# Altium PCB UCC28180-Controller.PcbDoc
Units mil, origin at the board's own origin, x right, y up, seen from the top; angles counter-clockwise.
Board outline 1574.8 x 1100 mil, 4 copper layers (Top Layer, Signal Layer 1, Signal Layer 2, Bottom Layer), stack 30.634 mil thick; 22 components, 10 nets, 52 pads, 21 vias.
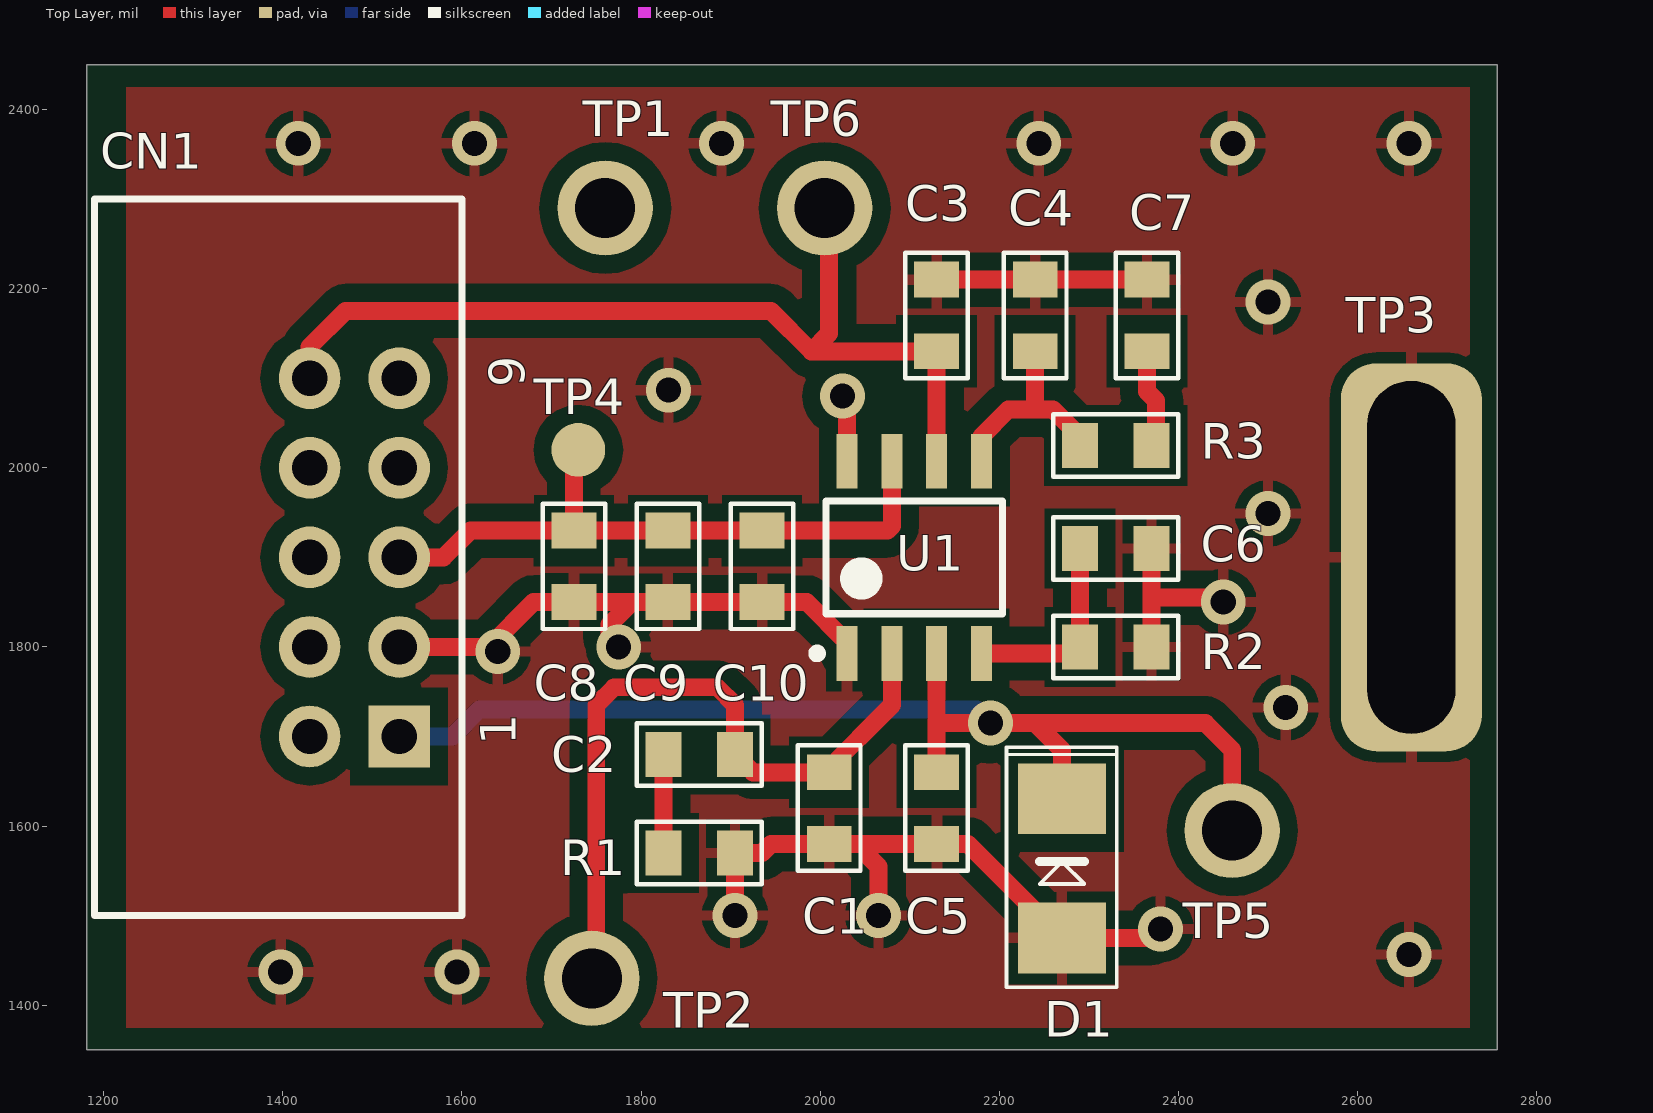
[diagram p0: Top Layer view]
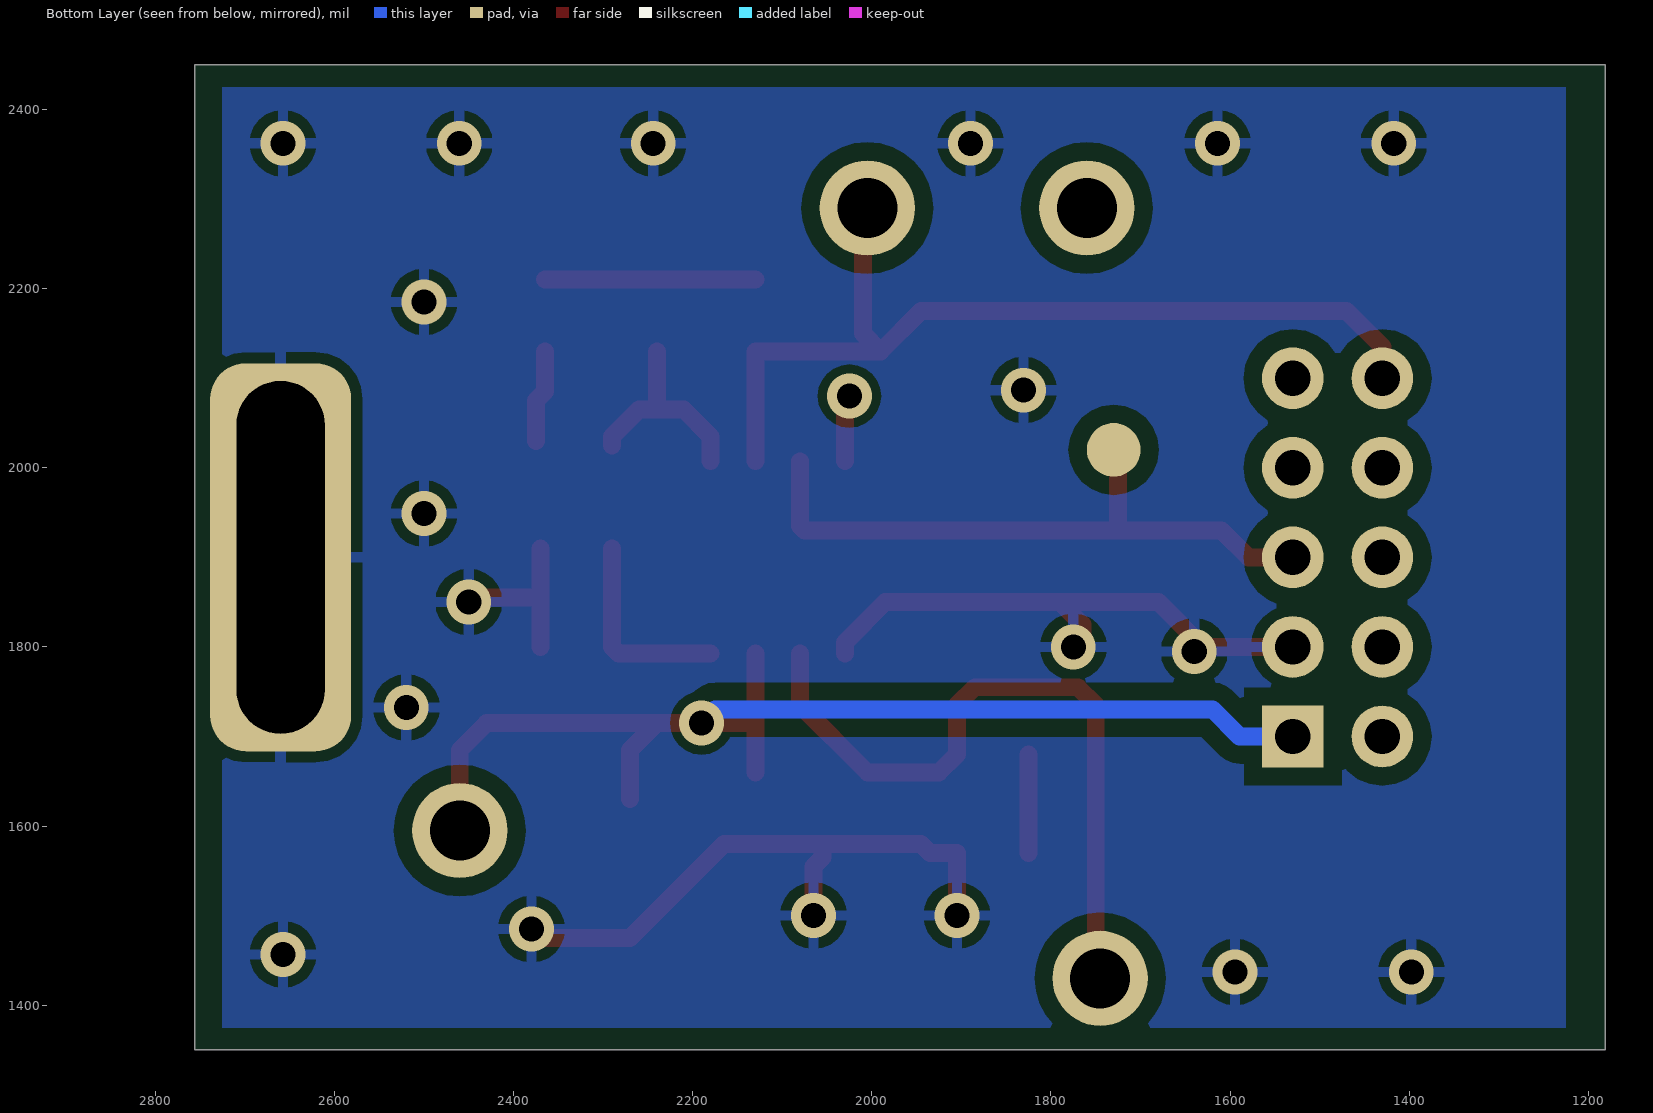
[diagram p1: Bottom Layer view, seen from below]
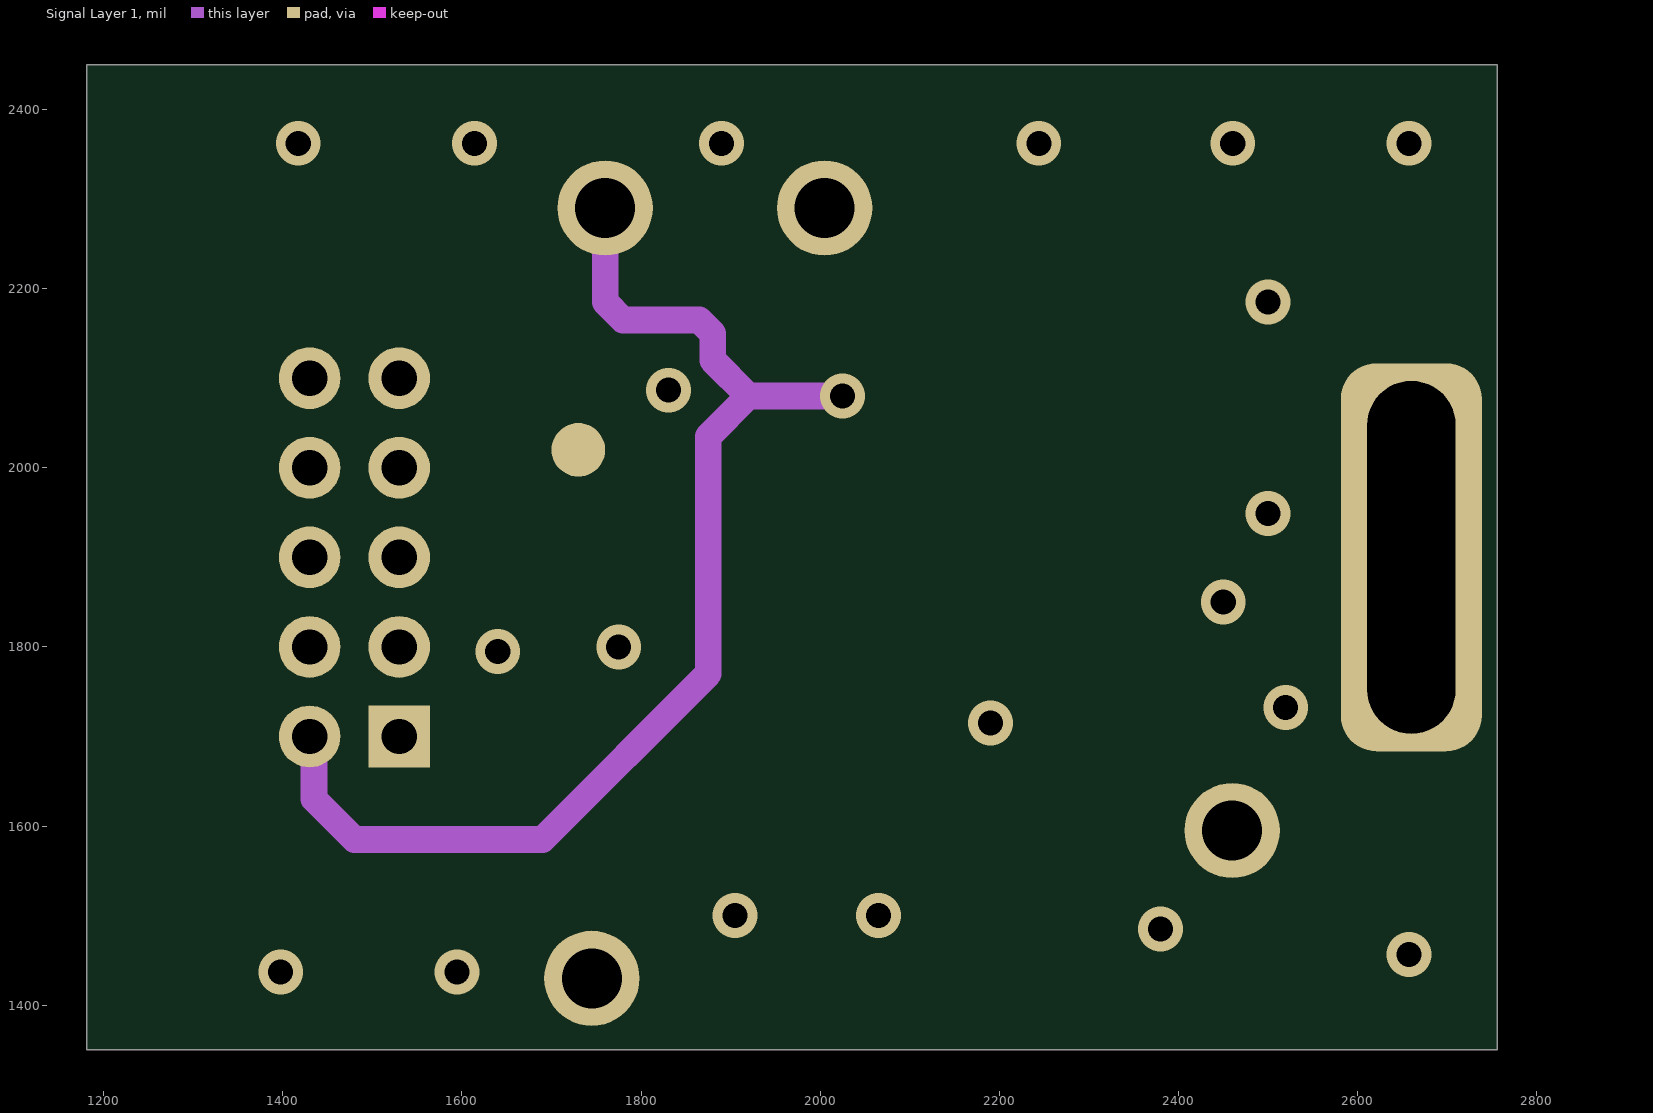
[diagram p2: Signal Layer 1]
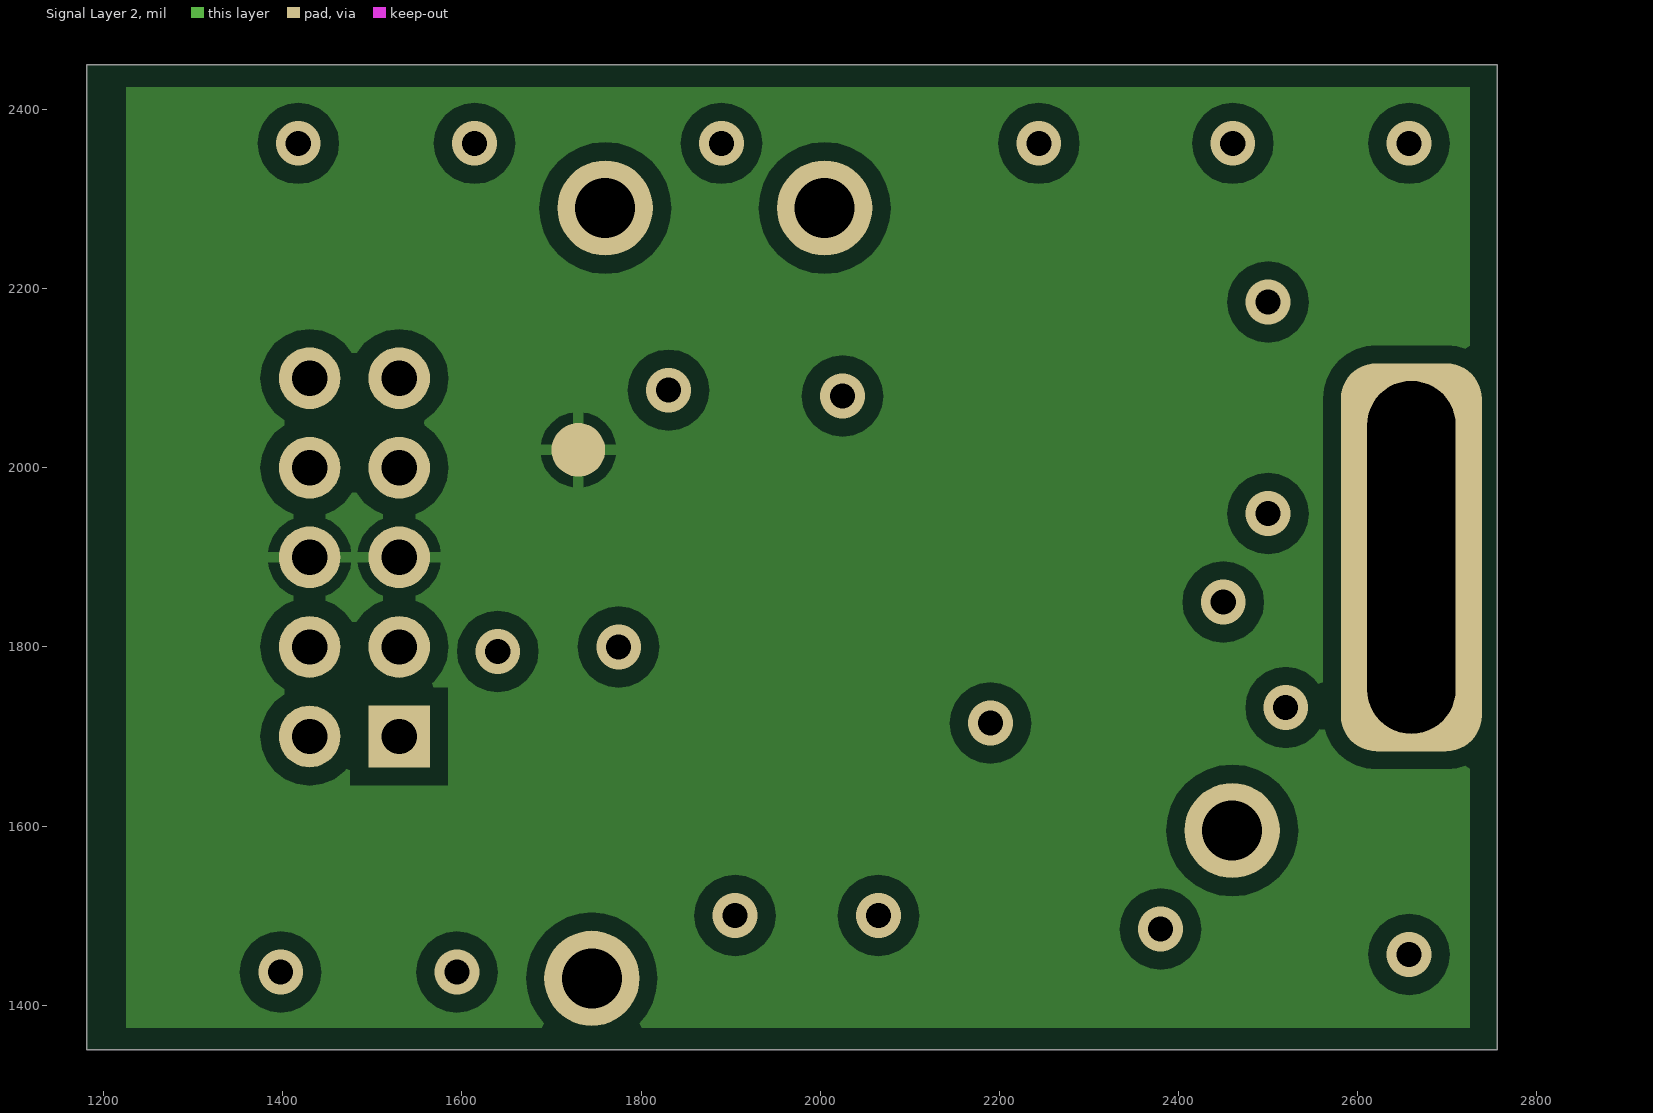
[diagram p3: Signal Layer 2]

## Layer stack, top to bottom
Top Solder: solder mask 0.4, Solder Resist, Dk 3.5
Top Layer: signal copper 1.4
Dielectric 1: core 10, FR-4, Dk 4.2
Signal Layer 1: signal copper 1.417
Dielectric 2: prepreg 5, Dk 4.2
Signal Layer 2: signal copper 1.417
Dielectric 3: core 10, Dk 4.2
Bottom Layer: signal copper 1.4
Bottom Solder: solder mask 0.4, Solder Resist, Dk 3.5

## Board outline
1181.1,1350 2755.91,1350 2755.91,2450 1181.1,2450

## Design rules (kind name [scope] priority, off if disabled: settings)
Clearance Clearance_3 [InNamedPolygon('Top Layer-GND')] p1: gap=10 except(20: Arc-Poly Track-Poly SMDPad-Poly THPad-Poly Via-Poly Fill-Poly Poly-Poly)
Clearance Clearance_2 [InNamedPolygon('Top Layer-GND')] p2: gap=10 except(20: Arc-Poly Track-Poly SMDPad-Poly THPad-Poly Via-Poly Fill-Poly Poly-Poly)
Clearance Clearance_1 [InNamedPolygon('Signal layer 2-12V')] p3: gap=10 except(20: Arc-Poly Track-Poly SMDPad-Poly THPad-Poly Via-Poly Fill-Poly Poly-Poly)
Clearance [All] p4: gap=10 except(20: Arc-Poly Track-Poly SMDPad-Poly THPad-Poly)
PlaneConnect [All] p1: planeconnectstyle=Relief reliefexpansion=20 reliefentries=4 reliefconductorwidth=12 reliefairgap=12
PolygonConnect [All] p1: connectstyle=Relief reliefconductorwidth=12 reliefentries=4 polygonreliefangle="90 Angle" airgapwidth=12
RoutingVias [All] p1: holewidth=28 width=50 viastyle="Through Hole" minholewidth=28 minwidth=50 maxholewidth=28 maxwidth=50
SolderMaskExpansion [All] p1: expansion=4
UnConnectedPin [All] p1:
Width [All] p1: maxlimit=200 minlimit=10 preferedwidth=10 midlayer2_maxwidth=10 minimp=50.000000 maximp=50.000000 favimp=50.000000
29 further rules are at their usual default settings.

## Components (designator, comment, footprint, x,y, rotation, side; value= is the part's Value field where it differs from the comment)
C1 "GRM2195C1H562FA01D" CAP0805_NEW 2010,1620 r90 top
C2 "C0805_Generic" CAP0805_NEW 1865,1680 r0 top
C3 "CC0805KRX7R9BB821" CAP0805_NEW 2130,2170 r270 top
C4 "C0805C474J5RACTU" CAP0805_NEW 2240,2170 r270 top
C5 "C0805C102J5GACTU" CAP0805_NEW 2130,1620 r90 top
C6 "C0805_Generic" CAP0805_NEW 2330,1910 r180 top
C7 "GRM21BR61H475KE51L" CAP0805_NEW 2365,2170 r270 top
C8 "C0805C104J5RACAUTO" CAP0805_NEW 1725,1890 r90 top
C9 "CC0805JKX7R9BB105" CAP0805_NEW 1830,1890 r90 top
C10 "C0805_Generic" CAP0805_NEW 1935,1890 r90 top
CN1 "MHR10N-ND" 3M15452 1530,1700 r90 top
D1 "MRA4004T3G" MRA4004T3G 2270,1555 r270 top
R1 "R0805_Generic" RES0805_New 1865,1570 r0 top
R2 "RC0805FR-0722KL" RES0805_New 2330,1800 r0 top
R3 "RC0805FR-0722K6L" RES0805_New 2330,2025 r0 top
TP1 "5006" "Test Point" 1760,2290 r0 top
TP2 "5006" "Test Point" 1745,1430 r0 top
TP3 "TP-Slot" TP-Slot 2660,1900 r90 top
TP4 "TP-SM" TP-SM 1730,2020 r90 top
TP5 "5006" "Test Point" 2460,1595 r0 top
TP6 "5006" "Test Point" 2005,2290 r0 top
U1 "UCC28180DR" SOP127P600X175-8N 2105,1900 r90 top

## Footprints (in the part's own frame and the unit in brackets; to place one, negate y for a bottom-side part, rotate by r counter-clockwise, add the part's x,y. Pads: shape width x height; smd on the part's side, far side on the other; paste and mask are expansions set on the pad)
3M15452 [mm] "CONN HEADER 10POS DL R/A GOLD"
  rect 1.75x1.75 hole 1: 1(0,0)
  round 1.75 hole 1: 2(0,2.54) 3(2.54,0) 4(2.54,2.54) 5(5.08,0) 6(5.08,2.54) 7(7.62,0) 8(7.62,2.54) 9(10.16,0) 10(10.16,2.54)
  silkscreen extent -5.08,-1.78 15.24,8.64
CAP0805_NEW [mil] "SMD_Capacitor"
  rect 40x50 smd: 1(-40,0) 2(40,0)
  silkscreen extent -70,-35 70,35, body extent -41,-25 40,25, height 26
MRA4004T3G [mm] "Diode_SMA"
  rect 2x2.5 smd: 1(2.032,0) 2(-1.913,0)
  silkscreen extent -3.38,-1.57 3.43,1.55, body extent -2.61,-1.3 2.59,1.3, height 2.4
RES0805_New [mil] "SMD_Resistor"
  rect 40x50 smd: 1(-40,0) 2(40,0)
  silkscreen extent -70,-35 70,35, body extent -41,-25 40,25, height 27
SOP127P600X175-8N [mm] "SOP, 8-Leads, Body 4.90x3.90mm, Pitch 1.27mm, IPC Medium Density"
  rect 1.55x0.6 smd: 1(-2.725,1.905) 2(-2.725,0.635) 3(-2.725,-0.635) 4(-2.725,-1.905) 5(2.725,-1.905) 6(2.725,-0.635) 7(2.725,0.635) 8(2.725,1.905)
  silkscreen extent -2.85,-2.5 1.6,2.88, body extent -2,-2.5 2,2.5, height 1.75
"Test Point" [mm] "Test Point"
  round 2.7 hole 1.7: 1(0,0)
  body extent -1.63,-1.5 1.55,1.68, height 5.49
TP-Slot [mm] "Special Test point-Slot"
  rrect50% 11x4 hole 2.5 slot 10 at 0 deg: 1(0,0)
TP-SM [mil] "Special Testpoint-Surface Mount"
  round 60 all layers, no hole: 1(0,0)

## Part data
C1: "CAP CER 5600PF 50V C0G/NP0 0805"
C3: "CAP CER 820PF 50V X7R 0805"
C4: "CAP CER 0.47UF 50V X7R 0805"
C5: "CAP CER 1000PF 50V C0G/NP0 0805"
C7: "CAP CER 4.7UF 50V X5R 0805"
C8: "CAP CER 0.1UF 50V X7R 0805"
C9: "CAP CER 1UF 50V X7R 0805"
CN1: "CONN HEADER 10PS R/A LONG LATCH"
R2: "RES SMD 22K OHM 1% 1/8W 0805"
R3: "RES SMD 22.6K OHM 1% 1/8W 0805"
TP1 TP2 TP5 TP6: "TEST POINT PC COMPACT .063\"D BLK"
U1: "IC PFC CTRLR AVERAGE CURR 8SOIC"

## Via types
v1: diameter 50, hole 28, Top Layer to Bottom Layer, tented both sides, 21 vias

## Nets (pads, with @x,y where several pads share a name; then routed paths per layer and width w, separated by ;. In a path a pad name is that pad's centre, name@x,y a point inside that pad or via, vN(x,y) a via of type N, cw(c..) or ccw(c..) an arc to the next point about the centre after c; other vN are vias at no path point)
GND: C1.1 C3.1 C4.1 C5.1 C6.1 C7.1 C8.1 C9.1 C10.1 CN1.3 D1.1 R1.2 R2.2 TP3.1 U1.1 | length 1710
  Top Layer w20: CN1.3 1630,1800 1680,1850 C8.1 1790,1850 ; v1@1765,1810 1765,1825 1790,1850 ; v1(1905,1500) R1.2 1935,1570 1945,1580 C1.1 2055,1580 ; U1.1 2030,1805 1985,1850 C10.1 C9.1 1790,1850 ; v1(2065,1500) 2065,1555 2055,1565 2055,1580 ; C3.1 C4.1 C7.1 ; R2.2 2370,1855 ; C6.1 2370,1855 ; v1(2380,1485) 2370,1475 D1.1 2165,1580 C5.1 2055,1580 ; v1(2450,1850) 2445,1855 2370,1855
  other v1: 1397.64,1437.01 1594.49,1437.01 2657.48,1456.69 2519.68,1732.28 1640,1795 1775,1800 2500,1948.82 1830.71,2086.61 2500,2185.04 1417.32,2362.2 1614.17,2362.2 1889.76,2362.2 2244.09,2362.2 2460.63,2362.2 2657.48,2362.2
GT_DRV: CN1.2 TP1.1 U1.8 | length 1427.7
  Top Layer w20: U1.8 v1@2030,2075
  Signal Layer 1 w30: CN1.2@1435,1695 1435,1630 1480,1585 1690,1585 1875,1770 1875,2035 1920,2080 ; TP1.1 1760,2185 1780,2165 1865,2165 1880,2150 1880,2120 1920,2080 ; v1(2025,2080) 1920,2080
I_FEEDBACK: C5.2 CN1.1 D1.2 TP5.1 U1.3 | length 1350.9
  Top Layer w20: C5.2 2130,1715 ; U1.3 2130,1715 ; D1.2 2270,1685 2240,1715 ; TP5.1@2460,1585 2460,1685 2430,1715 2240,1715 ; 2130,1715 v1(2190,1715) 2240,1715
  Bottom Layer w20: CN1.1 1589.45,1700 1619.45,1730 2175,1730 v1(2190,1715)
NetC1_2: C1.2 C2.2 TP2.1 U1.2 | length 805.7
  Top Layer w20: TP2.1 1750,1435 1750,1735 1770,1755 1885,1755 1905,1735 C2.2 1925,1660 2005,1660 2080,1735 U1.2
NetC2_1: C2.1 R1.1 | length 110
  Top Layer w20: R1.1 C2.1
NetC4_2: C4.2 R3.1 U1.5 | length 237.6
  Top Layer w20: U1.5 2180,2035 2210,2065 2240,2065 ; C4.2 2240,2065 ; R3.1 2290,2035 2260,2065 2240,2065
NetC7_2: C7.2 R3.2 | length 104.1
  Top Layer w20: C7.2 2365,2085 2375,2075 R3.2@2375,2030
SW_FREQ: C6.2 R2.1 U1.4 | length 223
  Top Layer w20: U1.4 2282.72,1792.72 R2.1 C6.2
V_FEEDBACK: C3.2 CN1.10 TP6.1 U1.6 | length 1061.2
  Top Layer w20: CN1.10 1430,2135 1470,2175 1945,2175 1990,2130 ; TP6.1@2010,2290 2010,2150 1990,2130 ; U1.6 C3.2 1990,2130
VCC: C8.2 C9.2 C10.2 CN1.5 CN1.6 TP4.1 U1.7 | length 721.8
  Top Layer w20: CN1.5 1579.45,1900 1609.45,1930 C8.2 ; TP4.1@1725,2015 C8.2 ; U1.7 2080,1935 2075,1930 C10.2 C9.2 C8.2
pads on no net: CN1.4 CN1.7 CN1.8 CN1.9

## Polygon pours and split planes (outlines as drawn)
GND on Top Layer "Top Layer-GND" (solid, pour order 0): 1225,2425 2725,2425 2725,1375 1225,1375 1225,2425
GND on Bottom Layer "GND_L04_P002" (solid, pour order 2): 1225,2425 1225,1375 2725,1375 2725,2425 1225,2425
VCC on Signal Layer 2 "Signal layer 2-12V" (solid, pour order 4): 1225,2425 2725,2425 2725,1375 1225,1375 1225,2425

## Silkscreen, mask and mechanical layers (free items; w line width, h text height)
Mechanical 2:
  the board outline again, w20

## Text inside footprints (layer, text, board x,y; h text height)
CN1: Top Overlay "9" at 1670,2090 h40 r90; Top Overlay "1" at 1660,1690 h40 r90